# Allegro board PiMod_ICA_R0A.brd
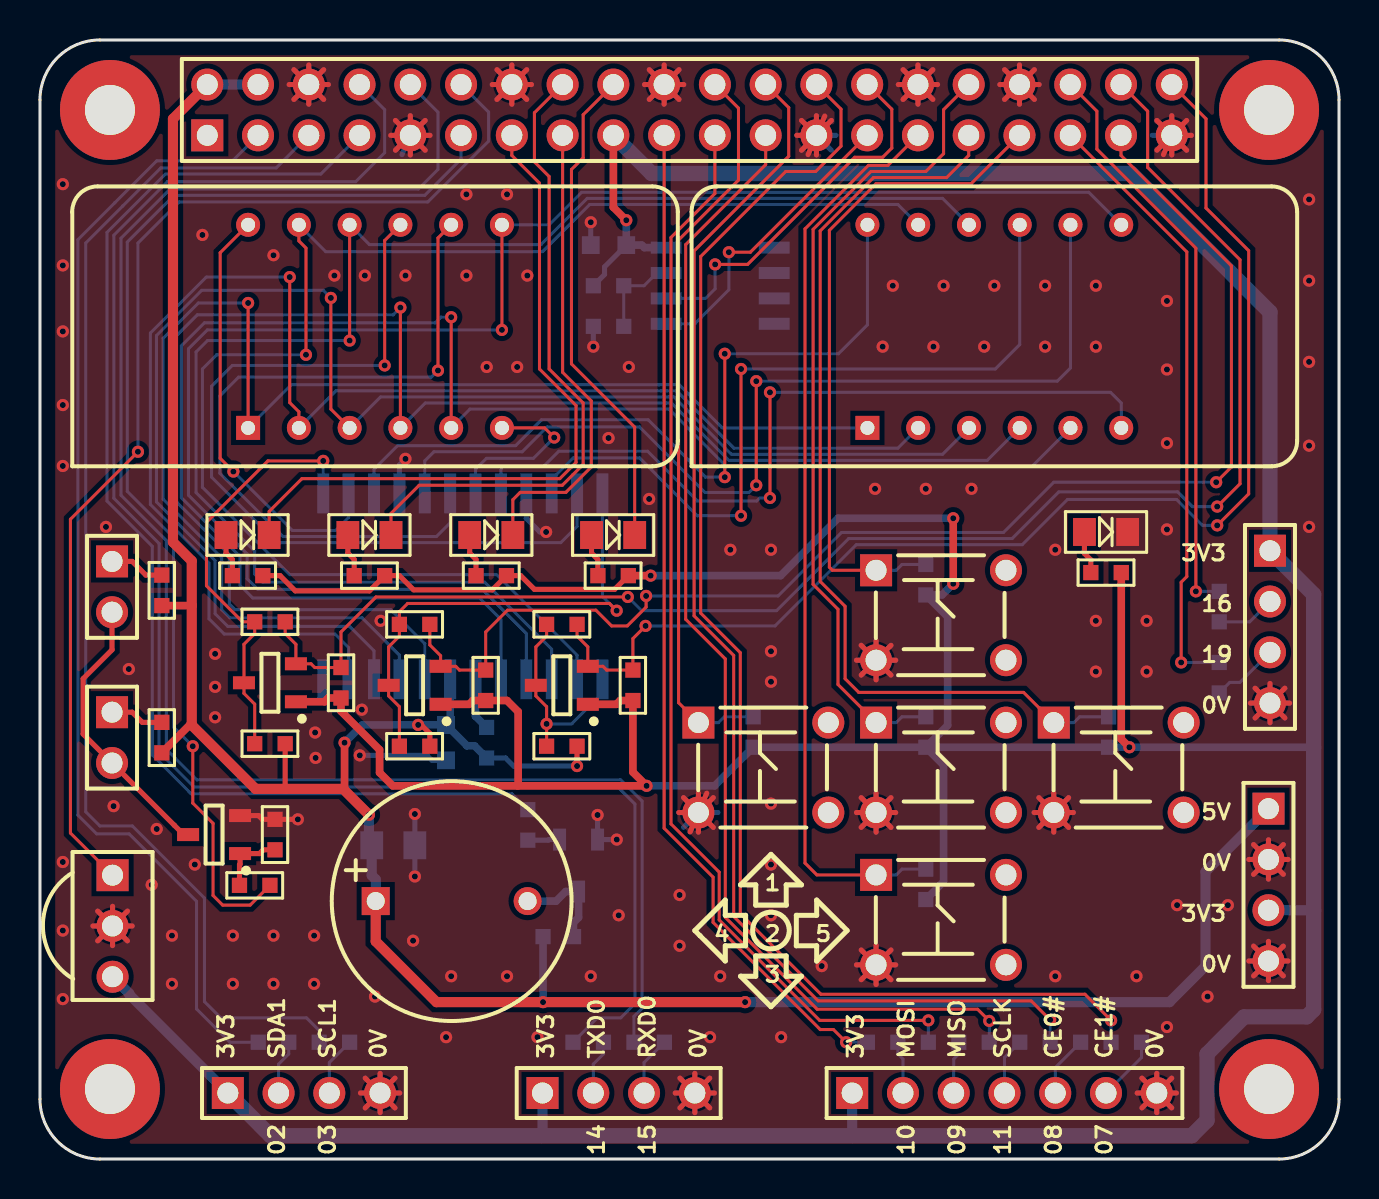
[diagram p0: board, top side]
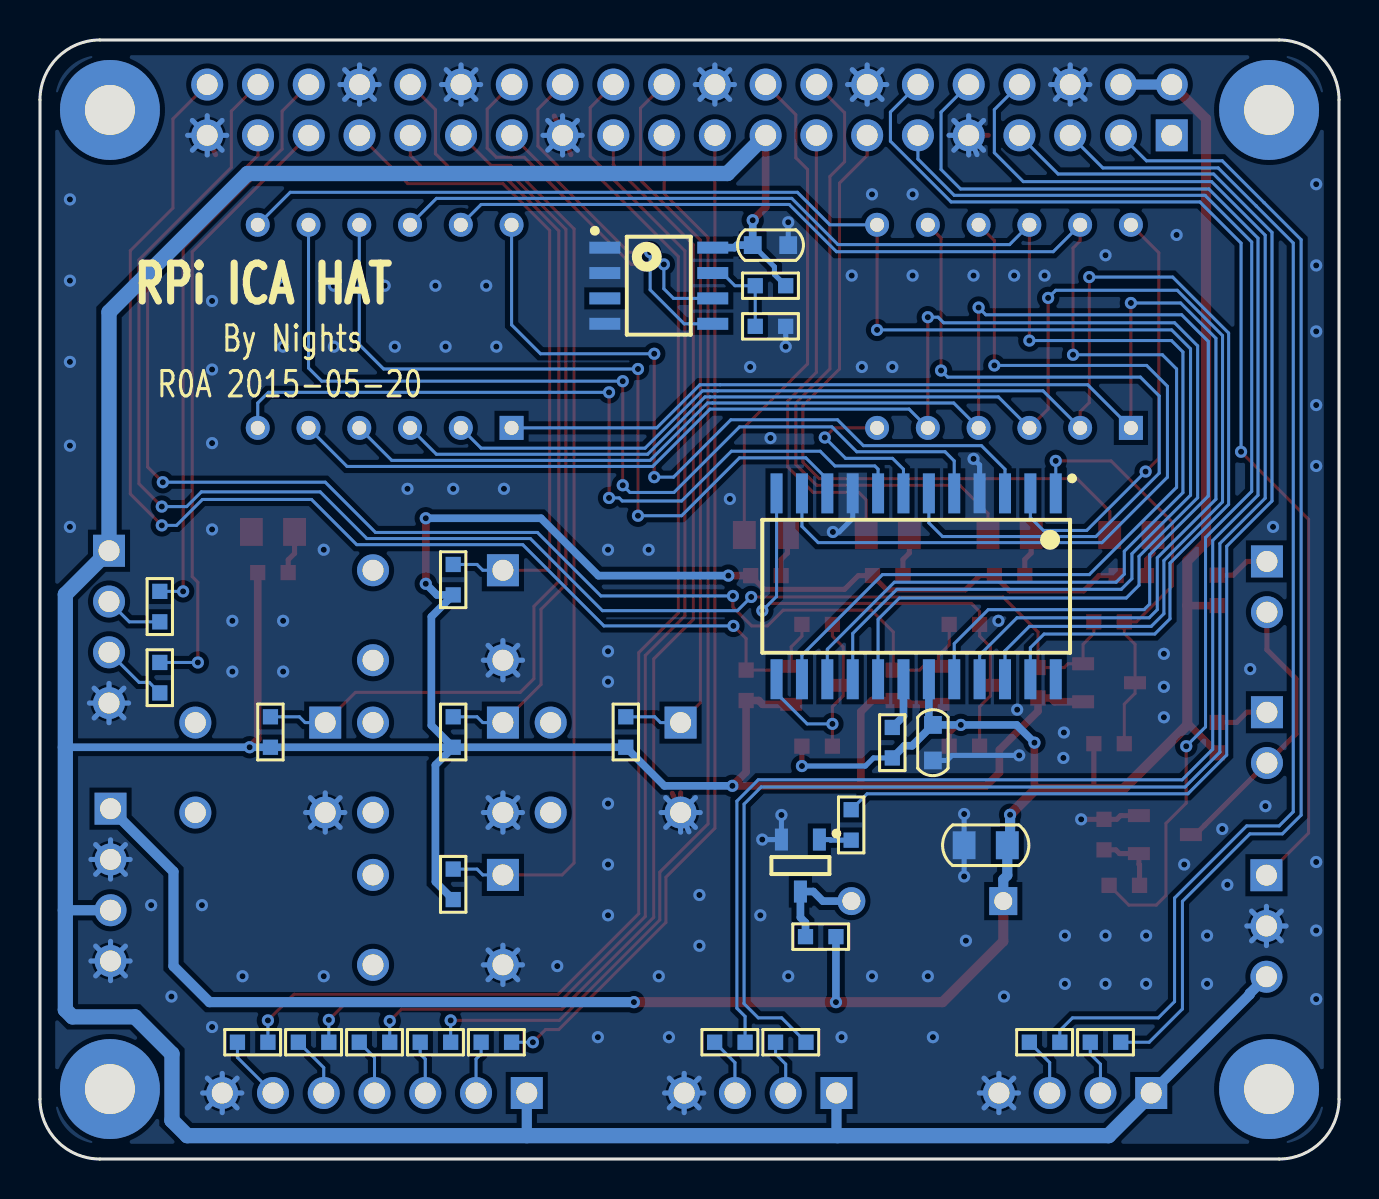
[diagram p1: board, bottom side, seen from below]

Outline 65 x 55.98 mm; copper layers: TOP, BOTTOM. Coordinates in mm from the lower left corner of the outline.
Outline path: 0,52.98 0,3 arc(0.88,0.88) 3,0 62,0 arc(64.12,0.88) 65,3 65,52.98 arc(64.12,55.1) 62,55.98 3,55.98 arc(0.88,55.1) 0,52.98

## Placement (name value [footprint] x y rotation side)
C1  0.1uF NC  [C0603]  28.45 45.72 90 bottom
C2  0.1uF  [C0603]  20.32 20.83 0 bottom
C3  10uF  [C0805]  17.68 15.7 270 bottom
D1  LED_IR  [SIP2]  3.61 29.9 270 top
D2  LED_IR NC  [SIP2]  3.61 22.35 270 top
J1  RPI CON  [SIP20X2]  8.37 51.21 0 top
J2  EXT IO  [SIP4]  61.54 30.43 270 top
J3  EXT IIC  [SIP4]  9.4 3.3 0 top
J4  EXT UART  [SIP4]  25.15 3.3 0 top
J5  EXT SPI  [SIP7]  40.64 3.3 0 top
J6  EXT PWR  [SIP4]  61.47 17.53 270 top
LD1  GRN  [LED0805]  10.39 31.22 90 top
LD2  GRN  [LED0805]  16.48 31.22 90 top
LD3  GRN  [LED0805]  22.58 31.22 90 top
LD4  GRN  [LED0805]  28.68 31.22 90 top
LD5  LED_SEG7_X4_DP  [LED_SEG7_X4_DP_036]  16.76 41.66 90 top
LD6  LED_SEG7_X4_DP  [LED_SEG7_X4_DP_036]  47.75 41.66 90 top
LD7  RED  [LED0805]  53.34 31.37 90 top
Q1  2N7002_NMOS  [SOT23]  11.51 23.83 180 top
Q2  2N7002_NMOS  [SOT23]  26.11 23.7 180 top
Q3  2N7002_NMOS  [SOT23]  18.75 23.7 180 top
Q4  9013  [SOT23]  8.71 16.23 180 top
Q5  9013  [SOT23]  26.95 14.68 270 bottom
R1  10K NC  [R0603]  27.69 43.69 0 bottom
R2  10K  [R0603]  15.06 23.06 90 top
R3  10K  [R0603]  12.27 20.78 180 top
R4  10K  [R0603]  22.35 20.07 90 bottom
R5  10K  [R0603]  29.67 22.94 90 top
R6  10K  [R0603]  26.87 20.65 180 top
R7  10K  [R0603]  44.32 28.22 90 bottom
R8  10K  [R0603]  44.32 20.6 90 bottom
R9  10K  [R0603]  44.32 12.98 90 bottom
R10  10K  [R0603]  35.69 20.6 90 bottom
R11  10K  [R0603]  53.47 20.6 90 bottom
R12  100R  [R0603]  59 28.4 270 bottom
R13  100R  [R0603]  59 24.84 270 bottom
R14  510R  [R0603]  9.63 29.18 0 top
R15  510R  [R0603]  15.72 29.18 0 top
R16  10K  [R0603]  22.3 22.94 90 top
R17  10K  [R0603]  19.51 20.65 180 top
R18  510R  [R0603]  21.82 29.18 0 top
R19  510R  [R0603]  27.91 29.18 0 top
R20  100R  [R0603]  10.92 5.84 0 bottom
R21  100R  [R0603]  13.97 5.84 0 bottom
R22  510R  [R0603]  52.58 29.34 0 top
R23  100R  [R0603]  26.67 5.84 0 bottom
R24  100R  [R0603]  29.72 5.84 0 bottom
R25  120R  [R0603]  6.1 27.69 90 top
R26  120R NC  [R0603]  6.1 20.32 90 top
R27  100R  [R0603]  41.4 5.84 0 bottom
R28  100R  [R0603]  44.45 5.84 0 bottom
R29  100R  [R0603]  47.5 5.84 0 bottom
R30  100R  [R0603]  50.55 5.84 0 bottom
R31  10K  [R0603]  25.17 11.13 0 bottom
R32  100R  [R0603]  53.59 5.84 0 bottom
R33  510R  [R0603]  11.51 13.69 180 top
R34  1K  [R0603]  24.41 17.48 270 bottom
R35  10K  [R0603]  11.76 15.47 90 top
R36  0R NC  [R0603]  12.27 26.87 180 top
R37  0R NC  [R0603]  26.87 26.75 180 top
R38  0R NC  [R0603]  19.51 26.75 180 top
R39  10K NC  [R0603]  29.21 41.66 180 bottom
SW1  USER_KEY  [SW_6X6_180D]  45.09 27.2 0 top
SW2  USER_KEY  [SW_6X6_180D]  45.09 19.58 0 top
SW3  USER_KEY  [SW_6X6_180D]  45.09 11.96 0 top
SW4  USER_KEY  [SW_6X6_180D]  36.2 19.58 0 top
SW5  USER_KEY  [SW_6X6_180D]  53.98 19.58 0 top
TH1  -  [TH2_5]  3.5 3.5 0 top
TH2  -  [TH2_5]  61.5 3.5 0 top
TH3  -  [TH2_5]  3.5 52.48 0 top
TH4  -  [TH2_5]  61.5 52.48 0 top
U1  AT24C02 NC  [SO8]  34.04 43.69 180 bottom
U2  MAX7219CWG  [WSO24]  21.16 28.65 270 bottom
U3  BUZZER  [BUZZER_12X9_5]  20.6 12.9 0 top
U4  HS0038  [IR_RECV]  3.63 11.66 0 top

## Library data of the parts
C1 C2 = CAP NP
C3 = CAP_CE_0603
D1 D2 LD1-LD4 LD7 = LED
J1 = HEADER 20X2
J2-J4 J6 = HEADER 4
J5 = HEADER 7
LD5 LD6 = LED_SEG7_X4_DP
Q1-Q3 = 2N7002_NMOS
Q4 Q5 = 9013
R1-R39 = R
SW1-SW5 = SW PUSHBUTTON
TH1-TH4 = THROUGH_HOLE
U1 = AT24C512
U2 = MAX7219CWG
U3 = BEEPER
U4 = IR_Reciever

## Footprints (pads in the part's own frame, mm; a bottom-side part is the same pattern mirrored in y, then rotated)
BUZZER_12X9_5
  rect 1.4x1.4 hole 0.9: 1(-3.8,0)
  round 1.4 hole 0.9: 2(3.8,0)
C0603
  rect 0.889x0.889 smd: 1(0,0.889) 2(0,-0.889)
C0805
  rect 1.397x1.143 smd: 1(0,1.079) 2(0,-1.079)
IR_RECV
  rect 1.6x1.6 hole 1.05: 1(0,2.54)
  round 1.6 hole 1.05: 2(0,0) 3(0,-2.54)
LED0805
  rect 1.397x1.143 smd: 1(0,1.079) 2(0,-1.079)
LED_SEG7_X4_DP_036
  rect 1.2x1.2 hole 0.7: 1(-5.08,6.35)
  round 1.2 hole 0.7: 2(-5.08,3.81) 3(-5.08,1.27) 4(-5.08,-1.27) 5(-5.08,-3.81) 6(-5.08,-6.35) 7(5.08,-6.35) 8(5.08,-3.81) 9(5.08,-1.27) 10(5.08,1.27) 11(5.08,3.81) 12(5.08,6.35)
R0603
  rect 0.762x0.762 smd: 1(0,0) 2(1.524,0)
SIP2
  rect 1.6x1.6 hole 1.05: 1(0,0)
  round 1.6 hole 1.05: 2(2.54,0)
SIP4
  rect 1.6x1.6 hole 1.05: 1(0,0)
  round 1.6 hole 1.05: 2(2.54,0) 3(5.08,0) 4(7.62,0)
SIP7
  rect 1.6x1.6 hole 1.05: 1(0,0)
  round 1.6 hole 1.05: 2(2.54,0) 3(5.08,0) 4(7.62,0) 5(10.16,0) 6(12.7,0) 7(15.24,0)
SIP20X2
  rect 1.6x1.6 hole 1.05: 1(0,0)
  round 1.6 hole 1.05: 2(0,2.54) 3(2.54,0) 4(2.54,2.54) 5(5.08,0) 6(5.08,2.54) 7(7.62,0) 8(7.62,2.54) 9(10.16,0) 10(10.16,2.54) 11(12.7,0) 12(12.7,2.54) 13(15.24,0) 14(15.24,2.54) 15(17.78,0) 16(17.78,2.54) 17(20.32,0) 18(20.32,2.54) 19(22.86,0) 20(22.86,2.54) 21(25.4,0) 22(25.4,2.54) 23(27.94,0) 24(27.94,2.54) 25(30.48,0) 26(30.48,2.54) 27(33.02,0) 28(33.02,2.54) 29(35.56,0) 30(35.56,2.54) 31(38.1,0) 32(38.1,2.54) 33(40.64,0) 34(40.64,2.54) 35(43.18,0) 36(43.18,2.54) 37(45.72,0) 38(45.72,2.54) 39(48.26,0) 40(48.26,2.54)
SO8
  rect 1.55x0.6 smd: 1(-2.7,1.905) 2(-2.7,0.635) 3(-2.7,-0.635) 4(-2.7,-1.905) 5(2.7,-1.905) 6(2.7,-0.635) 7(2.7,0.635) 8(2.7,1.905)
SOT23
  rect 1.1x0.65 smd: 1(-1.3,0.95) 2(-1.3,-0.95) 3(1.3,0)
SW_6X6_180D
  round 1.6 hole 1.05: (3.25,2.25) (3.25,-2.25) 2(-3.25,-2.25)
  rect 1.6x1.6 hole 1.05: 1(-3.25,2.25)
TH2_5
  round 5 hole 2.5: 1(0,0)
WSO24
  rect 2x0.6 smd: 1(-4.65,6.985) 2(-4.65,5.715) 3(-4.65,4.445) 4(-4.65,3.175) 5(-4.65,1.905) 6(-4.65,0.635) 7(-4.65,-0.635) 8(-4.65,-1.905) 9(-4.65,-3.175) 10(-4.65,-4.445) 11(-4.65,-5.715) 12(-4.65,-6.985) 13(4.65,-6.985) 14(4.65,-5.715) 15(4.65,-4.445) 16(4.65,-3.175) 17(4.65,-1.905) 18(4.65,-0.635) 19(4.65,0.635) 20(4.65,1.905) 21(4.65,3.175) 22(4.65,4.445) 23(4.65,5.715) 24(4.65,6.985)

## Nets
GND: C1.2 C2.1 C3.2 J1.6 J1.9 J1.14 J1.20 J1.25 J1.30 J1.34 J1.39 J2.4 J3.4 J4.4 J5.7 J6.2 J6.4 LD7.2(CATHODE) Q4.2(E) Q5.2(E) R35.2 R39.2 SW1.2 SW2.2 SW3.2 SW4.2 SW5.2 U1.1(A0) U1.2(A1) U1.4(GND) U2.4(GND#4) U2.9(GND#9) U4.2(GND)
VDD3V3: C1.1 J1.17 J2.1 J3.1 J4.1 J5.1 J6.3 Q1.1(GATE) Q2.1(GATE) Q3.1(GATE) R1.1 R2.1 R5.1 R7.1 R8.1 R9.1 R10.1 R11.1 R14.2 R15.2 R16.1 R18.2 R19.2 R22.2 U1.8(VCC) U4.3(VCC)
VDD5V: C2.2 C3.1 J1.2 J1.4 J6.1 R3.1 R4.1 R6.1 R17.1 R25.1 R26.1 R31.1 U2.19(VDD) U3.1(+)
COM1: LD5.12(DIGIT1) U2.2(DIG0)
COM2: LD5.9(DIGIT2) U2.11(DGI1)
COM3: LD5.8(DIGIT3) U2.6(DIG2)
COM4: LD5.6(DIGIT4) U2.7(DIG3)
COM5: LD6.12(DIGIT1) U2.3(DIG4)
COM6: LD6.9(DIGIT2) U2.10(DIG5)
COM7: LD6.8(DIGIT3) U2.5(DIG6)
COM8: LD6.6(DIGIT4) U2.8(DIG7)
GPIO2: J1.3 R20.1
GPIO3: J1.5 R21.1
GPIO4: J1.7 R34.1
GPIO5: J1.29 R9.2 SW3.1
GPIO6: J1.31 R11.2 SW5.1
GPIO7: J1.26 R32.1
GPIO8: J1.24 R30.1
GPIO9: J1.21 R28.1
GPIO10: J1.19 R27.1
GPIO11: J1.23 R29.1
GPIO12: J1.32 R8.2 SW2.1
GPIO13: J1.33 R7.2 SW1.1
GPIO14: J1.8 R23.1
GPIO15: J1.10 R24.1
GPIO16: J1.36 R12.1
GPIO17: J1.11 R33.1
GPIO18: J1.12 U4.1(DAT)
GPIO19: J1.35 R13.1
GPIO20: J1.38 Q1.2(SOURCE) R2.2 R36.1
GPIO21: J1.40 Q2.2(SOURCE) R5.2 R37.1
GPIO22: J1.15 LD3.2(CATHODE)
GPIO23: J1.16 LD2.2(CATHODE)
GPIO24: J1.18 LD4.2(CATHODE)
GPIO25: J1.22 R10.2 SW4.1
GPIO26: J1.37 Q3.2(SOURCE) R16.2 R38.1
GPIO27: J1.13 LD1.2(CATHODE)
ID_SC: J1.28 U1.6(SCL)
ID_SD: J1.27 U1.5(SDA)
ID_WP: R1.2 R39.1 U1.7(WP)
MAX7219_CLK: Q2.3(DRAIN) R6.2 R37.2 U2.13(CLK)
MAX7219_CS#: Q3.3(DRAIN) R17.2 R38.2 U2.12(CS#)
MAX7219_DIN: Q1.3(DRAIN) R3.2 R36.2 U2.1(DIN)
RXD0: J4.3 R24.2
SCL1: J3.3 R21.2
SDA1: J3.2 R20.2
SEG_A: LD5.11(A) LD6.11(A) U2.14(SEGA)
SEG_B: LD5.7(B) LD6.7(B) U2.16(SEGB)
SEG_C: LD5.4(C) LD6.4(C) U2.20(SEGC)
SEG_D: LD5.2(D) LD6.2(D) U2.23(SEGD)
SEG_DP: LD5.3(DP) LD6.3(DP) U2.22(SEGDP)
SEG_E: LD5.1(E) LD6.1(E) U2.21(SEGE)
SEG_F: LD5.10(F) LD6.10(F) U2.15(SEGF)
SEG_G: LD5.5(G) LD6.5(G) U2.17(SEGG)
SPI0_CE0#: J5.5 R30.2
SPI0_CE1#: J5.6 R32.2
SPI0_MISO: J5.3 R28.2
SPI0_MOSI: J5.2 R27.2
SPI0_SCLK: J5.4 R29.2
TXD0: J4.2 R23.2
N1407104: LD1.1(ANODE) R14.1
N1407130: LD2.1(ANODE) R15.1
N1407156: LD3.1(ANODE) R18.1
N1407182: LD4.1(ANODE) R19.1
N1408999: D1.1(ANODE) R25.2
N1409019: D2.1(ANODE) R26.2
N1409023: D1.2(CATHODE) D2.2(CATHODE) Q4.3(C)
N1436418: Q5.3(C) R31.2 U3.2(-)
N1436450: Q5.1(B) R34.2
N1438702: Q4.1(B) R33.2 R35.1
N1444528: LD7.1(ANODE) R22.1
N1452614: J2.2 R12.2
N1452620: J2.3 R13.2
N1481058: R4.2 U2.18(ISET)

Pads without a net: J1 1; TH1 1; TH2 1; TH3 1; TH4 1; U1 3; U2 24

## Via types
v1: diameter 0.61, hole 0.305, TOP to BOTTOM, 159 vias

## Routing (per net, layer and track width the routed paths; a pad name or vN(x,y) marks a point on that pad's centre or on a via; arc(x,y) is an arc through that point)
GND: length 344.7
  TOP w0.254: 17.79,51.95 J1.9 ; J1.9 19.51,51.21 ; J1.9 19.27,51.95 ; J1.9 17.79,50.47 ; J1.9 17.55,51.21 ; J1.9 18.53,52.19 ; J1.9 18.53,50.23 ; J1.9 19.27,50.47 ; SW2.2 41.84,18.31 ; SW2.2 40.85,17.33 ; SW2.2 42.58,16.59 ; SW2.2 42.82,17.33 ; SW2.2 42.58,18.08 ; SW2.2 41.09,18.08 ; SW2.2 41.09,16.59 ; SW2.2 41.84,16.35 ; J6.2 62.21,15.73 ; J6.2 62.21,14.24 ; J6.2 62.45,14.99 ; J6.2 61.47,15.97 ; J6.2 60.72,15.73 ; J6.2 61.47,14.01 ; J6.2 60.49,14.99 ; J6.2 60.72,14.24 ; SW5.2 50.73,18.31 ; SW5.2 49.74,17.33 ; SW5.2 51.47,18.08 ; SW5.2 51.47,16.59 ; SW5.2 50.73,16.35 ; SW5.2 51.71,17.33 ; SW5.2 49.98,18.08 ; SW5.2 49.98,16.59 ; J4.4 33.51,4.05 ; J4.4 33.51,2.56 ; J4.4 32.02,2.56 ; J4.4 32.02,4.05 ; J4.4 31.79,3.3 ; J4.4 32.77,4.28 ; J4.4 33.75,3.3 ; J4.4 32.77,2.32 ; J1.25 39.27,52.18 ; J1.25 39.59,51.95 ; J1.25 38.43,50.25 ; J1.25 37.87,51.21 ; J1.25 38.85,50.23 ; J1.25 38.85,52.19 ; J1.25 38.11,50.47 ; J1.25 38.11,51.95 ; J3.4 18,3.3 ; J3.4 17.02,2.32 ; J3.4 17.02,4.28 ; J3.4 17.76,4.05 ; J3.4 16.27,2.56 ; J3.4 16.27,4.05 ; J3.4 16.04,3.3 ; J3.4 17.76,2.56 ; J1.14 24.59,53.75 ; J1.14 22.63,53.75 ; J1.14 23.61,54.73 ; J1.14 23.61,52.77 ; J1.14 22.87,54.49 ; J1.14 24.35,54.49 ; J1.14 24.35,53.01 ; J1.14 22.87,53.01 ; 56.21,50.25 J1.39 ; J1.39 57.37,51.95 ; J1.39 55.89,51.95 ; J1.39 56.63,50.23 ; J1.39 55.89,50.47 ; J1.39 56.63,52.19 ; J1.39 57.61,51.21 ; J1.39 57.37,50.47 ; J2.4 62.29,22.07 ; J2.4 60.56,22.81 ; J2.4 61.54,21.83 ; J2.4 60.8,23.55 ; J2.4 61.54,23.79 ; J2.4 60.8,22.07 ; J2.4 62.29,23.55 ; J2.4 62.52,22.81 ; v1(12.9,16.99) R35.2 11.12,16.99 10.93,17.18 Q4.2 ; 32.2,18.08 SW4.2 ; SW4.2 33.36,18.3 ; SW4.2 31.96,17.33 ; SW4.2 32.53,16.37 ; SW4.2 33.69,16.59 ; SW4.2 32.95,16.35 ; SW4.2 33.69,18.08 ; SW4.2 32.95,18.31 ; J1.20 31.97,53.01 ; J1.20 30.25,53.75 ; J1.20 31.23,52.77 ; J1.20 30.49,54.49 ; J1.20 32.21,53.75 ; J1.20 30.49,53.01 ; J1.20 31.23,54.73 ; J1.20 31.97,54.49 ; SW1.2 41.84,25.93 ; SW1.2 40.85,24.95 ; SW1.2 41.09,25.7 ; SW1.2 42.58,25.7 ; SW1.2 41.84,23.97 ; SW1.2 42.82,24.95 ; SW1.2 41.09,24.21 ; SW1.2 42.58,24.21 ; SW3.2 42.58,10.46 ; SW3.2 42.82,9.71 ; SW3.2 41.84,8.73 ; SW3.2 41.84,10.69 ; SW3.2 41.09,10.46 ; SW3.2 40.85,9.71 ; SW3.2 41.09,8.97 ; SW3.2 42.58,8.97 ; 2.89,12.4 U4.2 ; U4.2 4.38,12.4 ; U4.2 2.65,11.66 ; U4.2 3.63,10.68 ; U4.2 3.63,12.64 ; U4.2 4.61,11.66 ; U4.2 2.89,10.92 ; U4.2 4.38,10.92 ; 12.71,54.49 J1.6 ; J1.6 14.19,53.01 ; J1.6 13.45,52.77 ; J1.6 12.71,53.01 ; J1.6 14.43,53.75 ; J1.6 12.47,53.75 ; J1.6 14.19,54.49 ; J1.6 13.45,54.73 ; 60.49,9.91 J6.4 ; J6.4 60.72,10.65 ; J6.4 62.21,10.65 ; J6.4 62.21,9.16 ; J6.4 61.47,8.93 ; J6.4 60.72,9.16 ; J6.4 61.47,10.89 ; J6.4 62.45,9.91 ; J1.34 49.01,54.73 ; J1.34 49.75,54.49 ; J1.34 48.03,53.75 ; J1.34 49.99,53.75 ; J1.34 49.75,53.01 ; J1.34 49.01,52.77 ; J1.34 48.27,54.49 ; J1.34 48.27,53.01 ; J1.30 44.91,53.75 ; J1.30 43.19,53.01 ; J1.30 43.19,54.49 ; J1.30 43.93,54.73 ; J1.30 42.95,53.75 ; J1.30 44.67,53.01 ; J1.30 44.67,54.49 ; J1.30 43.93,52.77 ; 55.88,2.32 J5.7 ; J5.7 54.9,3.3 ; J5.7 56.86,3.3 ; J5.7 56.62,4.05 ; J5.7 55.14,4.05 ; J5.7 56.62,2.56 ; J5.7 55.14,2.56 ; J5.7 55.88,4.28
  BOTTOM w0.254: 23.61,52.77 J1.14 ; J1.14 24.35,53.01 ; J1.14 24.35,54.49 ; J1.14 22.63,53.75 ; J1.14 23.61,54.73 ; J1.14 22.87,53.01 ; J1.14 24.59,53.75 ; J1.14 22.87,54.49 ; J3.4 17.76,4.05 ; J3.4 16.27,2.56 ; J3.4 18,3.3 ; J3.4 16.04,3.3 ; J3.4 17.02,4.28 ; J3.4 17.02,2.32 ; J3.4 16.27,4.05 ; J3.4 17.76,2.56 ; 55.89,51.95 J1.39 ; J1.39 57.37,50.47 ; J1.39 57.37,51.95 ; J1.39 57.61,51.21 ; J1.39 55.65,51.21 ; J1.39 56.63,50.23 ; J1.39 55.89,50.47 ; J1.39 56.63,52.19 ; 55.88,2.32 J5.7 ; J5.7 55.88,4.28 ; J5.7 56.62,2.56 ; J5.7 54.9,3.3 ; J5.7 55.14,2.56 ; J5.7 56.86,3.3 ; J5.7 55.14,4.05 ; J5.7 56.62,4.05 ; 41.09,24.21 SW1.2 ; SW1.2 41.84,25.93 ; SW1.2 40.85,24.95 ; SW1.2 42.58,25.7 ; SW1.2 41.09,25.7 ; SW1.2 41.84,23.97 ; SW1.2 42.58,24.21 ; SW1.2 42.82,24.95 ; 60.49,9.91 J6.4 ; J6.4 62.45,9.91 ; J6.4 60.72,9.16 ; J6.4 61.47,10.89 ; J6.4 60.72,10.65 ; J6.4 61.47,8.93 ; J6.4 62.21,10.65 ; J6.4 62.21,9.16 ; SW3.2 41.84,10.69 ; SW3.2 40.85,9.71 ; SW3.2 41.84,8.73 ; SW3.2 41.09,10.46 ; SW3.2 41.09,8.97 ; SW3.2 42.58,8.97 ; SW3.2 42.58,10.46 ; SW3.2 42.82,9.71 ; SW2.2 42.58,18.08 ; SW2.2 41.09,18.08 ; SW2.2 40.85,17.33 ; SW2.2 41.09,16.59 ; SW2.2 42.82,17.33 ; SW2.2 42.58,16.59 ; SW2.2 41.84,16.35 ; SW2.2 41.84,18.31 ; 49.98,16.59 SW5.2 ; SW5.2 50.73,16.35 ; SW5.2 49.74,17.33 ; SW5.2 51.47,18.08 ; SW5.2 51.47,16.59 ; SW5.2 50.73,18.31 ; SW5.2 49.98,18.08 ; SW5.2 51.71,17.33 ; 61.47,14.01 J6.2 ; J6.2 62.45,14.99 ; J6.2 61.47,15.97 ; J6.2 62.21,15.73 ; J6.2 60.49,14.99 ; J6.2 62.21,14.24 ; J6.2 60.72,15.73 ; J6.2 60.72,14.24 ; 31.96,17.33 SW4.2 ; SW4.2 32.95,16.35 ; SW4.2 33.69,16.59 ; SW4.2 32.2,18.08 ; SW4.2 33.69,18.08 ; SW4.2 32.2,16.59 ; SW4.2 33.93,17.33 ; SW4.2 32.53,16.37 ; J1.6 13.45,54.73 ; J1.6 14.19,53.01 ; J1.6 12.71,53.01 ; J1.6 12.71,54.49 ; J1.6 14.19,54.49 ; J1.6 14.43,53.75 ; J1.6 12.47,53.75 ; J1.6 13.45,52.77 ; 32.77,2.32 J4.4 ; J4.4 33.75,3.3 ; J4.4 32.02,2.56 ; J4.4 33.51,4.05 ; J4.4 32.02,4.05 ; J4.4 32.77,4.28 ; J4.4 31.79,3.3 ; J4.4 33.51,2.56 ; 43.19,53.01 J1.30 ; J1.30 44.67,53.01 ; J1.30 43.93,52.77 ; J1.30 44.91,53.75 ; J1.30 42.95,53.75 ; J1.30 44.67,54.49 ; J1.30 43.19,54.49 ; J1.30 43.93,54.73 ; 48.27,53.01 J1.34 ; J1.34 48.03,53.75 ; J1.34 49.01,54.73 ; J1.34 49.99,53.75 ; J1.34 48.27,54.49 ; J1.34 49.75,53.01 ; J1.34 49.01,52.77 ; J1.34 49.75,54.49 ; 2.65,11.66 U4.2 ; U4.2 4.38,12.4 ; U4.2 3.63,12.64 ; U4.2 4.61,11.66 ; U4.2 2.89,12.4 ; U4.2 4.38,10.92 ; U4.2 3.63,10.68 ; U4.2 2.89,10.92 ; 61.54,21.83 J2.4 ; J2.4 60.8,22.07 ; J2.4 60.8,23.55 ; J2.4 62.29,23.55 ; J2.4 61.54,23.79 ; J2.4 60.56,22.81 ; J2.4 62.29,22.07 ; J2.4 62.52,22.81 ; J1.20 32.21,53.75 ; J1.20 30.49,54.49 ; J1.20 31.23,52.77 ; J1.20 31.23,54.73 ; J1.20 30.49,53.01 ; J1.20 31.97,54.49 ; J1.20 30.25,53.75 ; J1.20 31.97,53.01 ; J1.9 19.27,51.95 ; J1.9 17.79,50.47 ; J1.9 18.53,52.19 ; J1.9 19.27,50.47 ; J1.9 18.11,50.25 ; J1.9 18.53,50.23 ; J1.9 17.79,51.95 ; J1.9 19.51,51.21 ; v1(16,20.19) 19.36,20.19 19.62,19.94 C2.1 ; U2.4 17.98,34.72 v1(18.29,35.03) ; J1.25 39.59,51.95 ; J1.25 39.59,50.47 ; J1.25 39.83,51.21 ; J1.25 38.85,52.19 ; J1.25 38.11,50.47 ; J1.25 38.11,51.95 ; J1.25 37.87,51.21 ; J1.25 38.85,50.23 ; v1(18.76,14.14) C3.2 v1(18.76,17.26) ; C1.2 v1(27.56,46.86) ; U2.9 24.33,32.04 25.01,31.37 v1(25.32,31.37) ; v1(27.9,17.21) Q5.2 v1(28.86,15.98) ; R39.2 v1(27.69,40.64)
  vias: v1(1.14,48.77) v1(1.14,44.7) v1(1.14,41.4) v1(1.14,37.72) v1(1.14,34.67) v1(1.14,14.86) v1(1.14,11.43) v1(1.14,8) v1(3.3,31.62) v1(3.68,17.65) v1(4.45,24.51) v1(5.59,13.72) v1(5.84,16.51) v1(6.6,11.18) v1(6.6,8.76) v1(7.75,14.73) v1(8.13,46.23) v1(8.76,25.27) v1(8.76,23.62) v1(8.76,22.1) v1(9.65,11.18) v1(9.65,8.76) v1(11.68,45.21) v1(11.68,11.18) v1(11.68,8.76) v1(13.72,11.18) v1(13.72,8.76) v1(13.77,21.34) v1(13.79,20.07) v1(14.73,44.2) v1(16.1,22.48) v1(16.26,44.2) v1(16.76,8.13) v1(17.04,26.92) v1(18.29,44.2) v1(18.67,10.92) v1(20.32,6.1) v1(20.57,9.14) v1(21.34,48.26) v1(21.34,44.2) v1(22.35,39.62) v1(23.37,48.26) v1(23.37,9.14) v1(23.88,39.62) v1(24.38,44.2) v1(24.89,6.1) v1(27.56,9.14) v1(28.45,36.07) v1(28.96,12.19) v1(29.46,39.62) v1(30.48,33.02) v1(32,13.21) v1(32,10.67) v1(33.53,6.1) v1(34.04,9.14) v1(34.54,30.48) v1(36.58,30.48) v1(36.58,25.4) v1(36.58,23.88) v1(36.58,17.78) v1(36.58,14.73) v1(36.58,12.19) v1(37.08,6.1) v1(39.12,9.65) v1(41.78,33.53) v1(42.16,40.64) v1(42.67,43.69) v1(44.32,33.53) v1(44.7,40.64) v1(45.21,43.69) v1(46.61,33.53) v1(47.24,40.64) v1(47.75,43.69) v1(50.29,43.69) v1(50.29,40.64) v1(50.8,30.48) v1(50.8,9.14) v1(52.83,43.69) v1(52.83,40.64) v1(52.83,26.92) v1(52.83,24.38) v1(54.86,9.14) v1(55.37,26.92) v1(55.37,24.38) v1(56.39,42.93) v1(56.39,39.5) v1(56.39,35.81) v1(56.39,31.5) v1(56.39,6.6) v1(56.9,12.7) v1(58.42,8.13) v1(59.44,12.7) v1(63.5,48.01) v1(63.5,43.94) v1(63.5,39.88) v1(63.5,35.69) v1(63.5,31.62)
VDD3V3: length 295
  TOP w0.254: R14.2 12.01,29.18 12.78,28.42 16.48,28.42 R15.2 17.98,29.18 18.69,28.47 22.63,28.47 R18.2 24.05,29.18 24.74,28.5 28.75,28.5 R19.2
  TOP w0.381: v1(45.69,32.05) v1(45.69,28.78) ; Q2.1 28.84,22.75 29.03,22.94 R5.1 29.67,19.35 v1(30.35,18.67) 23.9,18.67 ; Q3.1 21.48,22.75 21.66,22.94 R16.1 23.37,22.94 23.93,22.38 23.93,18.69 23.9,18.67 ; Q1.1 14.24,22.88 14.42,23.06 R2.1 15.06,22.4 16.99,20.47 16.99,19.33 17.65,18.67 23.9,18.67 ; J1.17 28.69,47.61 v1(29.34,46.96) ; v1(54.51,20.6) 54.1,21.01 R22.2 ; R19.2 v1(30.56,29.18)
  BOTTOM w0.254: C1.1 28.25,44.63 28.25,44.25 R1.1
  BOTTOM w0.381: v1(45.69,32.05) 39.93,32.05 37.06,29.18 v1(30.56,29.18) ; R8.1 45.21,19.71 45.21,13.87 R9.1 ; R8.1 45.42,21.69 45.42,27.13 R7.1 45.14,28.22 v1(45.69,28.78) ; R8.1 R11.1 v1(54.51,20.6) 63.73,20.6 ; R8.1 R10.1 33.76,18.67 v1(30.35,18.67) ; v1(29.34,46.96) C1.1 30.11,45.72 30.24,45.59 U1.8
  BOTTOM w0.508: J6.3 63.73,12.45 ; U4.3 4.47,8.28 4.47,8.23 J3.1 ; J5.1 40.64,1.17 ; 25.1,1.17 25.15,1.22 J4.1
  BOTTOM w0.762: J3.1 11.53,1.17 57.63,1.17 58.39,1.93 58.39,5.26 60.25,7.11 63.37,7.11 63.73,7.47 63.73,28.24 J2.1 61.54,42.37 54.61,49.3 30.6,49.3 J1.17
VDD5V: length 134.7
  TOP w0.254: R17.1 19.51,21.29 19.08,21.72 v1(18.92,21.72) ; R6.1 v1(26.87,19.66) ; R3.1 12.27,18.54 12.29,18.52
  TOP w0.381: v1(15.24,20.83) 15.24,18.59 15.16,18.52 ; R26.1 7.48,21.71 7.59,21.71 ; R25.1 7.59,27.69
  TOP w0.508: v1(35.28,7.85) v1(25.17,7.85) 19.84,7.85 16.8,10.89 U3.1 ; J1.2 6.65,52.04 6.65,30.86 7.59,29.92 7.59,21.71 10.78,18.52 15.16,18.52 v1(16.46,17.22)
  BOTTOM w0.254: R4.1 23.29,20.07 23.7,19.66 v1(26.87,19.66)
  BOTTOM w0.381: U2.19 20.52,21.92 C2.2 ; v1(15.24,20.83) 16.13,21.72 v1(18.92,21.72) C2.2 ; R31.1 v1(25.17,7.85) ; C2.2 21.36,20.67 21.74,20.67 R4.1
  BOTTOM w0.508: J6.1 58.32,14.38 58.32,9.65 56.52,7.85 v1(35.28,7.85) ; J1.4 J1.2 ; v1(16.46,17.22) 16.46,15.84 C3.1 16.6,14.19 16.8,13.99 U3.1
COM1: length 21.7
  TOP w0.152: LD5.12 9.02,45.34 9.02,35.05 v1(9.68,34.39)
  BOTTOM w0.152: v1(9.68,34.39) 12.62,31.45 14.79,31.45 15.44,32.09 U2.2
COM2: length 42.6
  TOP w0.152: LD5.9 17.25,45.95 v1(17.25,39.7)
  BOTTOM w0.152: v1(17.25,39.7) 9.63,39.7 8.59,38.66 8.59,34.11 11.86,30.84 26.06,30.84 26.87,31.65 U2.11
COM3: length 37.5
  TOP w0.152: v1(19.91,39.45) 19.91,46.08 LD5.8
  BOTTOM w0.152: U2.6 20.52,31.83 19.84,31.14 12.17,31.14 9,34.31 9,38.18 9.94,39.12 19.58,39.12 v1(19.91,39.45)
COM4: length 8.6
  TOP w0.152: v1(25.73,36.09) 25.25,36.58 LD5.6
  BOTTOM w0.152: v1(25.73,36.09) 24.69,35.05 22.34,35.05 21.79,34.51 U2.7
COM5: length 39.9
  TOP w0.152: v1(34.26,34.11) v1(34.26,40.28)
  BOTTOM w0.152: v1(34.26,40.28) 39.95,40.28 41.4,41.73 LD6.12 ; U2.3 16.71,34.51 17.89,35.69 23.8,35.69 25.1,36.98 30.43,36.98 33.3,34.11 v1(34.26,34.11)
COM6: length 39.6
  TOP w0.152: v1(35.08,32.18) v1(35.08,39.52)
  BOTTOM w0.152: v1(35.08,32.18) 32.89,32.18 30,35.08 26.68,35.08 25.6,34 U2.10 ; LD6.9 49.02,40.74 47.8,39.52 v1(35.08,39.52)
COM7: length 48.8
  TOP w0.152: v1(35.84,33.71) v1(35.84,38.91)
  BOTTOM w0.152: v1(35.84,38.91) 50.9,38.91 51.56,39.57 LD6.8 ; v1(35.84,33.71) 35.48,33.34 33.28,33.34 29.99,36.63 25.37,36.63 24.13,35.38 19.71,35.38 19.25,34.92 U2.5
COM8: length 40.5
  TOP w0.152: v1(36.53,38.35) v1(36.53,33.07)
  BOTTOM w0.152: LD6.6 54.1,37.82 53.57,38.35 v1(36.53,38.35) ; U2.8 23.06,34.51 23.23,34.67 25.22,34.67 25.96,35.41 30.4,35.41 32.89,32.92 35.86,32.92 36.01,33.07 v1(36.53,33.07)
GPIO2: length 56.8
  BOTTOM w0.152: R20.1 9.5,5.84 7.83,7.51 7.83,12.89 4.46,16.27 2.83,16.27 1.9,17.2 1.9,45.99 3.75,47.84 5.84,49.94 9.63,49.94 J1.3
GPIO3: length 61.7
  BOTTOM w0.152: J1.5 11.82,49.58 6.05,49.58 4.14,47.68 2.29,45.83 2.29,17.37 3,16.66 4.62,16.66 8.23,13.06 8.23,7.87 9.04,7.06 13.34,7.06 13.97,6.43 R21.1
GPIO4: length 61.7
  BOTTOM w0.152: R34.1 23.61,18.27 7.56,18.27 5.62,20.21 5.62,30.65 3.35,32.92 3.35,46.36 6.27,49.28 14.05,49.28 J1.7
GPIO5: length 45.7
  TOP w0.152: J1.29 42.43,49.71 41.45,49.71 38.28,46.53 38.28,14.81 38.87,14.21 SW3.1
  BOTTOM w0.152: SW3.1 42.84,14.21 43.13,14.5 R9.2
GPIO6: length 47.1
  TOP w0.152: J1.31 46.47,50.21 45.36,49.1 41.71,49.1 39.04,46.43 39.04,28.89 40.28,27.65 40.28,24.03 40.97,23.34 49.22,23.34 SW5.1
  BOTTOM w0.152: R11.2 52.02,22.12 51.73,21.83 SW5.1
GPIO7: length 68.5
  TOP w0.152: v1(53.59,6.93) 52.29,8.24 39.07,8.24 35.04,12.27 35.04,25.33 33.06,27.31 33.06,45.15 37.31,49.4 38.81,49.4 40.08,50.67 40.08,52.52 J1.26
  BOTTOM w0.152: v1(53.59,6.93) R32.1
GPIO8: length 64
  TOP w0.152: v1(50.55,6.96) 49.59,7.91 38.93,7.91 34.71,12.14 34.71,25.19 32.73,27.17 32.73,45.43 37.47,50.16 37.47,52.6 J1.24
  BOTTOM w0.152: v1(50.55,6.96) R30.1
GPIO9: length 54.8
  TOP w0.152: v1(44.45,6.93) 39.01,6.93 33.99,11.96 33.99,14.35 31.57,16.76 31.57,46.1 33.77,48.3 J1.21
  BOTTOM w0.152: v1(44.45,6.93) R28.1
GPIO10: length 50.6
  TOP w0.152: J1.19 31.23,16.55 33.68,14.1 33.68,11.84 39.04,6.48 39.7,6.48 v1(40.34,5.84)
  BOTTOM w0.152: v1(40.34,5.84) R27.1
GPIO11: length 58
  TOP w0.152: J1.23 36.31,49.75 32.31,45.75 32.31,27 34.29,25.02 34.29,12.09 38.89,7.49 46.91,7.49 v1(47.5,6.91)
  BOTTOM w0.152: v1(47.5,6.91) R29.1
GPIO12: length 40.7
  TOP w0.152: SW2.1 39.93,23.74 39.93,27.5 38.68,28.75 38.68,46.51 41.58,49.4 44.32,49.4 45.21,50.29 45.21,52.49 J1.32
  BOTTOM w0.152: R8.2 43.13,22.12 42.84,21.83 SW2.1
GPIO13: length 33.3
  TOP w0.152: J1.33 46.59,48.79 41.83,48.79 39.5,46.46 39.5,29.61 39.65,29.45 SW1.1
  BOTTOM w0.152: SW1.1 42.84,29.45 43.13,29.74 R7.2
GPIO14: length 84.8
  BOTTOM w0.152: R23.1 27.89,7.06 29.06,7.06 29.77,7.77 29.77,17.75 28.91,18.61 7.7,18.61 5.96,20.35 5.96,30.79 3.69,33.06 3.69,46.21 6.38,48.9 15.8,48.9 17.25,50.34 17.25,52.49 J1.8
GPIO15: length 85.7
  BOTTOM w0.152: R24.1 29.72,7.13 30.13,7.54 30.13,17.9 29.06,18.97 7.85,18.97 6.32,20.5 6.32,30.94 4.05,33.21 4.05,46.07 6.52,48.53 18.94,48.53 19.91,49.5 19.91,52.37 J1.10
GPIO16: length 29.1
  TOP w0.152: v1(57.84,28.4) 57.84,45.57 52.88,50.52 52.88,52.42 J1.36
  BOTTOM w0.152: v1(57.84,28.4) R12.1
GPIO17: length 57.5
  TOP w0.152: v1(7.65,20.65) 7.65,17.81 8.66,16.79 8.66,13.18 9.14,12.7 10.52,12.7 R33.1
  BOTTOM w0.152: J1.11 21.07,50.03 19.25,48.21 6.71,48.21 4.37,45.87 4.37,33.4 6.68,31.09 6.68,21.62 v1(7.65,20.65)
GPIO18: length 57
  TOP w0.152: v1(4.9,35.38) 1.52,32 1.52,16.31 U4.1
  BOTTOM w0.152: J1.12 22.45,52.37 22.45,50.92 19.41,47.88 6.96,47.88 4.9,45.82 v1(4.9,35.38)
GPIO19: length 30.8
  TOP w0.152: v1(57.1,24.84) 57.1,28.85 57.38,29.14 57.38,45.38 J1.35
  BOTTOM w0.152: v1(57.1,24.84) R13.1
GPIO20: length 78.1
  TOP w0.152: R36.1 12.27,26.29 12.81,25.75 Q1.2 13.56,24.78 13.75,24.59 R2.2 15.06,26.37 16.81,28.12 v1(29.41,28.12) ; J1.38 55.42,52.42 55.42,49.61 60.05,44.98 60.05,33.78 v1(58.9,32.64)
  BOTTOM w0.152: v1(29.41,28.12) 30.1,27.43 36.86,27.43 40.46,31.04 48.64,31.04 50.98,33.38 56.92,33.38 57.66,32.64 v1(58.9,32.64)
GPIO21: length 63.2
  TOP w0.152: v1(58.9,31.7) 60.48,33.27 60.48,45.44 58.34,47.57 58.34,52.04 J1.40 ; v1(30.3,26.67) 29.67,26.04 R5.2 28.36,24.46 28.17,24.65 Q2.2 27.41,25.62 26.87,26.16 R37.1
  BOTTOM w0.152: v1(30.3,26.67) 36.78,26.67 40.84,30.73 49.15,30.73 51.41,32.99 56.87,32.99 58.17,31.7 v1(58.9,31.7)
GPIO22: length 23.6
  TOP w0.152: LD3.2 23.66,32.98 24.03,33.35 26.31,33.35 27.58,34.62 27.58,37.92 26.15,39.36 J1.15
GPIO23: length 32.3
  TOP w0.152: LD2.2 17.56,32.3 18.97,33.71 26.14,33.71 27.18,34.75 27.18,37.82 25.48,39.52 25.48,49.15 24.74,49.89 24.74,52.34 J1.16
GPIO24: length 24.7
  TOP w0.152: J1.18 27.18,52.24 27.18,50.09 26.59,49.5 26.59,39.78 29.76,36.61 LD4.2
GPIO25: length 36.9
  TOP w0.152: SW4.1 31.95,22.83 31.95,45.97 34.95,48.97 34.95,52.57 J1.22
  BOTTOM w0.152: R10.2 34.24,22.12 33.95,21.83 SW4.1
GPIO26: length 67.2
  TOP w0.152: J1.37 54.09,50.21 59.61,44.68 59.61,34.62 v1(58.85,33.86) ; v1(30.33,28.17) 30.33,27.61 29.39,26.67 28.6,26.67 27.81,27.46 23.39,27.46 22.3,26.37 R16.2 20.99,24.46 20.8,24.65 Q3.2 20.05,25.18 19.51,25.72 R38.1
  BOTTOM w0.152: v1(58.85,33.86) 50.72,33.86 48.21,31.34 40.11,31.34 36.93,28.17 v1(30.33,28.17)
GPIO27: length 35.2
  TOP w0.152: LD1.2 11.47,32.4 13.11,34.04 26.01,34.04 26.82,34.85 26.82,37.69 24.99,39.52 24.99,48.82 23.61,50.21 J1.13
ID_SC: length 18.8
  TOP w0.152: v1(33.78,44.75) 35.41,44.75 40.77,50.11 42.16,50.11 42.62,50.57 42.62,52.52 J1.28
  BOTTOM w0.152: v1(33.78,44.75) 33.78,43.54 33.3,43.05 31.34,43.05
ID_SD: length 15.1
  TOP w0.152: v1(34.47,45.36) 35.54,45.36 J1.27
  BOTTOM w0.152: v1(34.47,45.36) 34.47,43.48 32.77,41.78 U1.5
ID_WP: length 4.4
  BOTTOM w0.152: U1.7 30.86,44.32 30.23,43.69 R1.2 R39.1
MAX7219_CLK: length 10.7
  TOP w0.152: R37.2 25.35,26.16 24.81,25.62 Q2.3 24.81,23.17 25.35,22.63 v1(25.35,21.77) R6.2
  BOTTOM w0.152: U2.13 28.14,23.3 26.61,21.77 v1(25.35,21.77)
MAX7219_CS#: length 24.5
  TOP w0.152: v1(28.85,27.43) 28.49,27.79 18.4,27.79 17.98,27.38 R38.2 17.98,26.16 17.45,25.62 Q3.3 17.45,23.17 17.98,22.63 R17.2
  BOTTOM w0.152: v1(28.85,27.43) 28.14,28.14 U2.12
MAX7219_DIN: length 21.6
  TOP w0.152: v1(14.17,34.92) 11.4,34.92 8.33,31.85 8.33,28.68 10.13,26.87 R36.2 10.74,26.29 10.21,25.75 Q1.3 10.21,23.29 10.74,22.76 R3.2
  BOTTOM w0.152: v1(14.17,34.92) U2.1
RXD0: length 3
  BOTTOM w0.152: J4.3 30.23,4.83 R24.2
SCL1: length 3
  BOTTOM w0.152: R21.2 14.48,4.83 J3.3
SDA1: length 2.8
  BOTTOM w0.152: J3.2 11.94,4.75 12.45,5.25 R20.2
SEG_A: length 74.4
  TOP w0.152: v1(13.31,40.23) 13.31,45.57 12.95,45.93 LD5.11
  BOTTOM w0.152: LD6.11 42.93,47.75 27.51,47.75 25.15,45.39 14.3,45.39 LD5.11 ; v1(13.31,40.23) 8.84,40.23 8.13,39.52 8.13,33.6 12.5,29.24 22.85,29.24 26.87,25.21 U2.14
SEG_B: length 83.8
  TOP w0.152: v1(23.11,41.48) LD5.7
  BOTTOM w0.152: LD5.7 25.48,46.74 27.1,48.36 52.48,48.36 LD6.7 ; v1(23.11,41.48) 8.38,41.48 7.43,40.53 7.43,33.21 10.36,30.28 10.36,29.03 10.9,28.5 22.12,28.5 24.33,26.29 U2.16
SEG_C: length 78.3
  TOP w0.152: LD5.4 v1(18.03,42.6)
  BOTTOM w0.152: LD5.4 19.28,37.82 31.35,37.82 31.6,37.82 34.47,34.95 47.4,34.95 LD6.4 ; U2.20 19.25,25.78 17.55,27.48 9.75,27.48 9.47,27.76 9.47,30.23 6.54,33.17 6.54,40.9 7.88,42.23 17.67,42.23 v1(18.03,42.6)
SEG_D: length 73.9
  TOP w0.152: LD5.2 12.95,37.38 12.5,37.84 v1(12.5,44.12)
  BOTTOM w0.152: LD6.2 42.93,35.56 34.72,35.56 31.85,38.43 31.35,38.43 31.09,38.43 14.81,38.43 LD5.2 ; U2.23 15.44,25.58 14.76,26.26 9.22,26.26 8.46,27.03 8.46,29.81 5.52,32.75 5.52,41.32 8.32,44.12 v1(12.5,44.12)
SEG_DP: length 75.4
  TOP w0.152: v1(14.55,43.08) 14.55,37.52 LD5.3
  BOTTOM w0.152: v1(14.55,43.08) 14.17,43.46 8.09,43.46 5.83,41.19 5.83,32.87 8.76,29.94 8.76,27.28 9.4,26.64 15.49,26.64 16.71,25.43 U2.22 ; LD5.3 17.04,38.13 31.22,38.13 31.47,38.13 31.73,38.13 34.6,35.26 45.16,35.26 LD6.3
SEG_E: length 69.8
  TOP w0.152: v1(10.41,42.82) LD5.1
  BOTTOM w0.152: U2.21 17.98,25.21 16.11,27.08 9.5,27.08 9.09,27.48 9.09,30.08 6.16,33.01 6.16,41.06 7.93,42.82 v1(10.41,42.82) ; LD5.1 12.57,38.73 30.97,38.73 31.22,38.74 31.98,38.74 34.14,36.58 LD6.1
SEG_F: length 76.9
  TOP w0.152: v1(15.49,40.94) LD5.10
  BOTTOM w0.152: LD6.10 45.16,48.06 27.38,48.06 25.07,45.75 16.48,45.75 LD5.10 ; v1(15.49,40.94) 8.38,40.94 7.81,40.37 7.81,33.34 10.74,30.4 10.74,29.26 11.15,28.85 22.25,28.85 25.6,25.5 U2.15
SEG_G: length 82.9
  TOP w0.152: LD5.5 v1(20.57,42.11)
  BOTTOM w0.152: v1(20.57,42.11) 20.06,42.11 19.78,41.83 8.23,41.83 7.07,40.68 7.07,33.08 10.01,30.15 10.01,28.7 10.64,28.07 22,28.07 23.06,27 U2.17 ; LD5.5 21.51,37.52 31.47,37.52 34.34,34.65 49.63,34.65 LD6.5
SPI0_CE0#: length 3.1
  BOTTOM w0.152: R30.2 50.8,4.57 J5.5
SPI0_CE1#: length 3.3
  BOTTOM w0.152: R32.2 55.12,5.08 J5.6
SPI0_MISO: length 2.6
  BOTTOM w0.152: R28.2 45.97,5.25 45.72,5 J5.3
SPI0_MOSI: length 2.6
  BOTTOM w0.152: J5.2 43.18,5 42.93,5.25 R27.2
SPI0_SCLK: length 2.9
  BOTTOM w0.152: R29.2 48.26,5.08 J5.4
TXD0: length 2.8
  BOTTOM w0.152: J4.2 27.69,4.75 28.19,5.25 R23.2
N1407104: length 2.2
  TOP w0.254: R14.1 9.63,29.99 9.31,30.31 LD1.1
N1407130: length 2.2
  TOP w0.254: R15.1 15.72,29.99 15.41,30.31 LD2.1
N1407156: length 2.2
  TOP w0.254: LD3.1 21.5,30.31 21.82,29.99 R18.1
N1407182: length 2.2
  TOP w0.254: R19.1 27.91,29.99 27.6,30.31 LD4.1
N1408999: length 2.8
  TOP w0.254: D1.1 4.61,29.9 5.3,29.21 R25.2
N1409019: length 2.7
  TOP w0.254: D2.1 4.61,22.35 5.12,21.84 R26.2
N1409023: length 14
  TOP w0.254: Q4.3 7.19,16.23 6.72,16.7 D2.2 2.16,21.26 2.16,24.03 3.61,25.48 D1.2
N1436418: length 5.1
  BOTTOM w0.381: U3.2 25.83,12.9 26.3,13.38 Q5.3 26.95,12.08 26.7,11.83 R31.2
N1436450: length 1.6
  BOTTOM w0.254: Q5.1 25.47,15.98 25.44,15.95 R34.2
N1438702: length 3.4
  TOP w0.254: R33.2 9.98,14.72 10.01,14.75 Q4.1 10.98,15.28 11.17,15.47 R35.1
N1444528: length 2.2
  TOP w0.254: R22.1 52.58,29.98 52.26,30.29 LD7.1
N1452614: length 3
  BOTTOM w0.152: R12.2 60.53,26.87 J2.2
N1452620: length 3.4
  BOTTOM w0.152: R13.2 59.53,23.84 60.04,23.84 J2.3
N1481058: length 2.6
  BOTTOM w0.381: U2.18 21.79,22.15 R4.2

## Copper pours and planes (outline as drawn; the poured copper is in the pictures)
GND on TOP: 3,0.76 1.42,1.42 0.76,3 0.76,52.98 1.42,54.56 3,55.22 62,55.22 63.58,54.56 64.24,52.98 64.24,3 63.58,1.42 62,0.76 ; 19 cut-outs
GND on BOTTOM: 3,0.76 1.42,1.42 0.76,3 0.76,52.98 1.42,54.56 3,55.22 62,55.22 63.58,54.56 64.24,52.98 64.24,3 63.58,1.42 62,0.76

## Text on the board
Ref Des/Silkscreen Bottom: By Nights | R0A 2015-05-20 | RPi ICA HAT
Ref Des/Silkscreen Top: 4 | 1 | 2 | 3 | 5 | 3V3 | 16 | 19 | 0V | 5V | SDA1 | 02 | SCL1 | 03 | TXD0 | 14 | RXD0 | 15 | MOSI | 10 | MISO | 09 | SCLK | 11 | CE0# | 08 | CE1# | 07
